# Altium PCB PCB1.PcbDoc
Units mm, origin at the board's own origin, x right, y up, seen from the top; angles counter-clockwise.
Board outline 20 x 40 mm, 2 copper layers (Top Layer, Bottom Layer); 2 components, 30 nets, 60 pads, 0 vias.
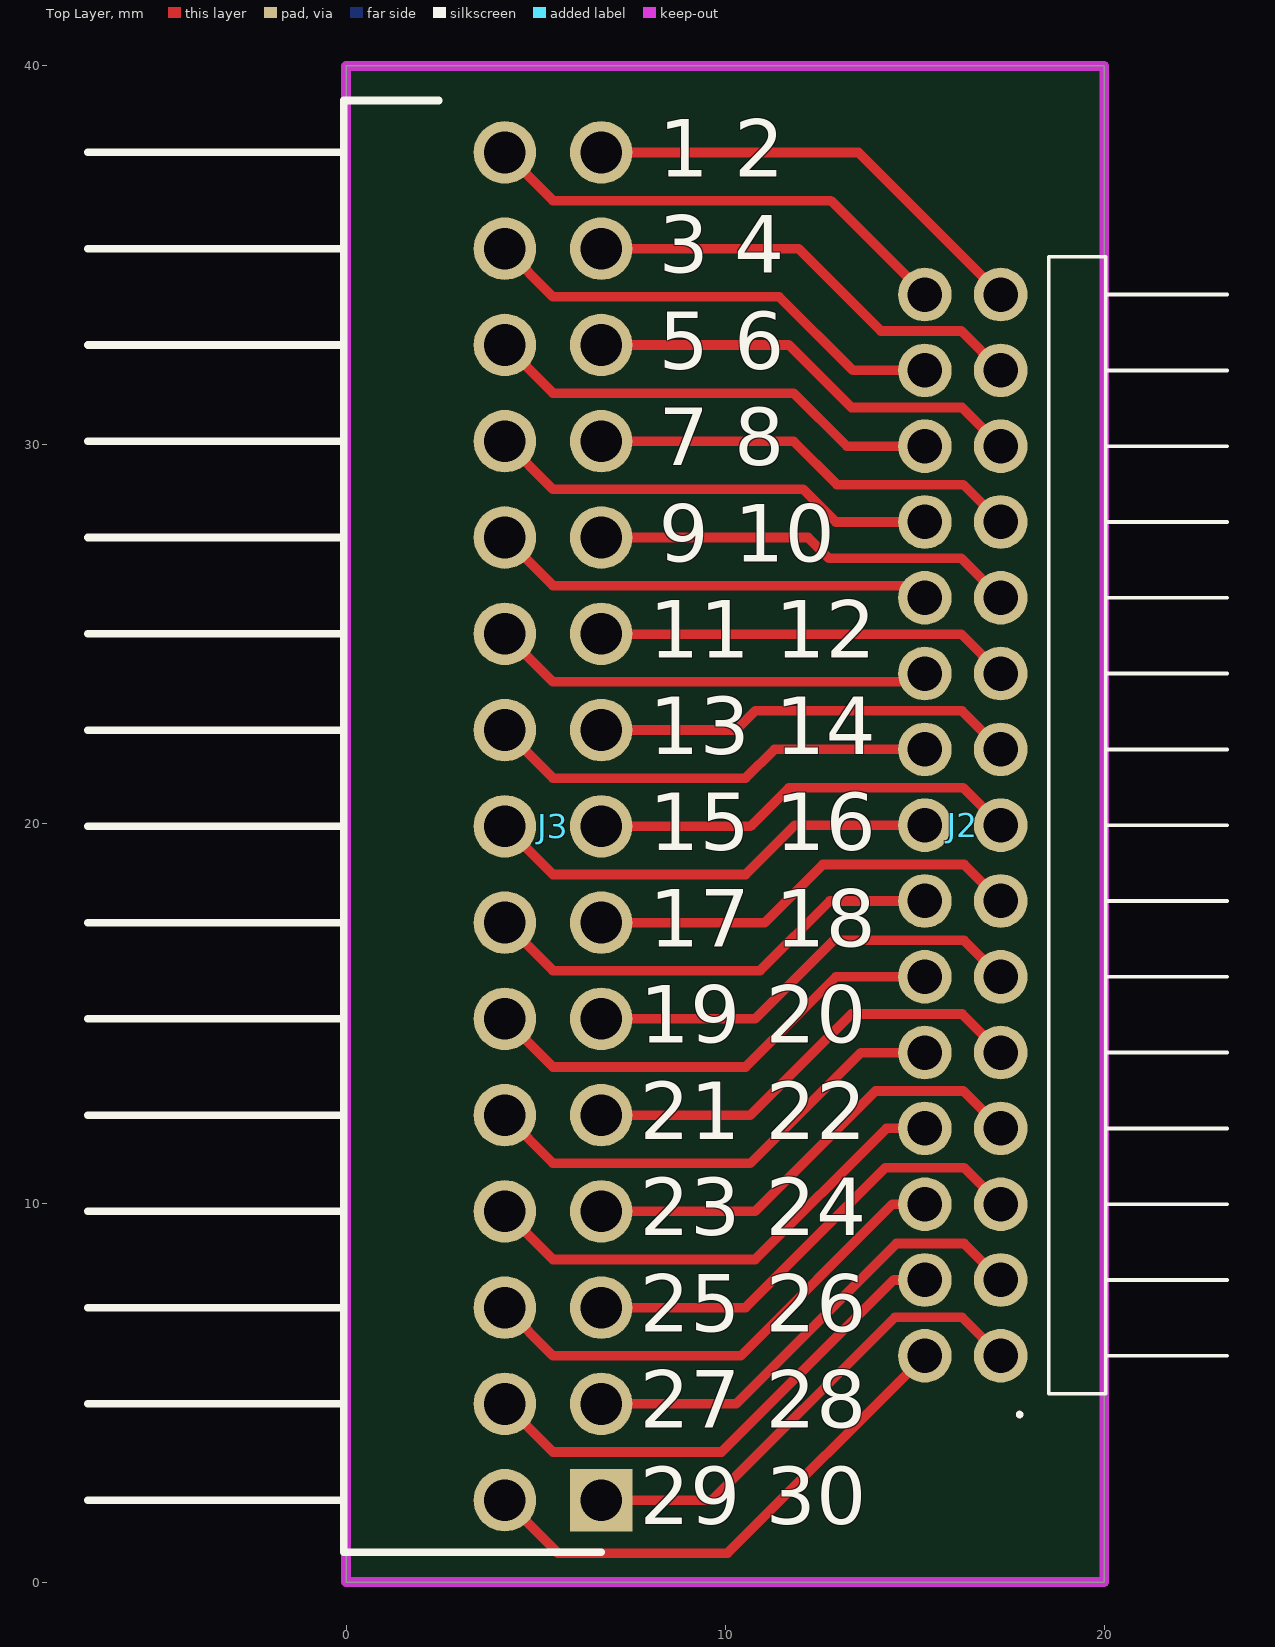
[diagram p0: Top Layer view]
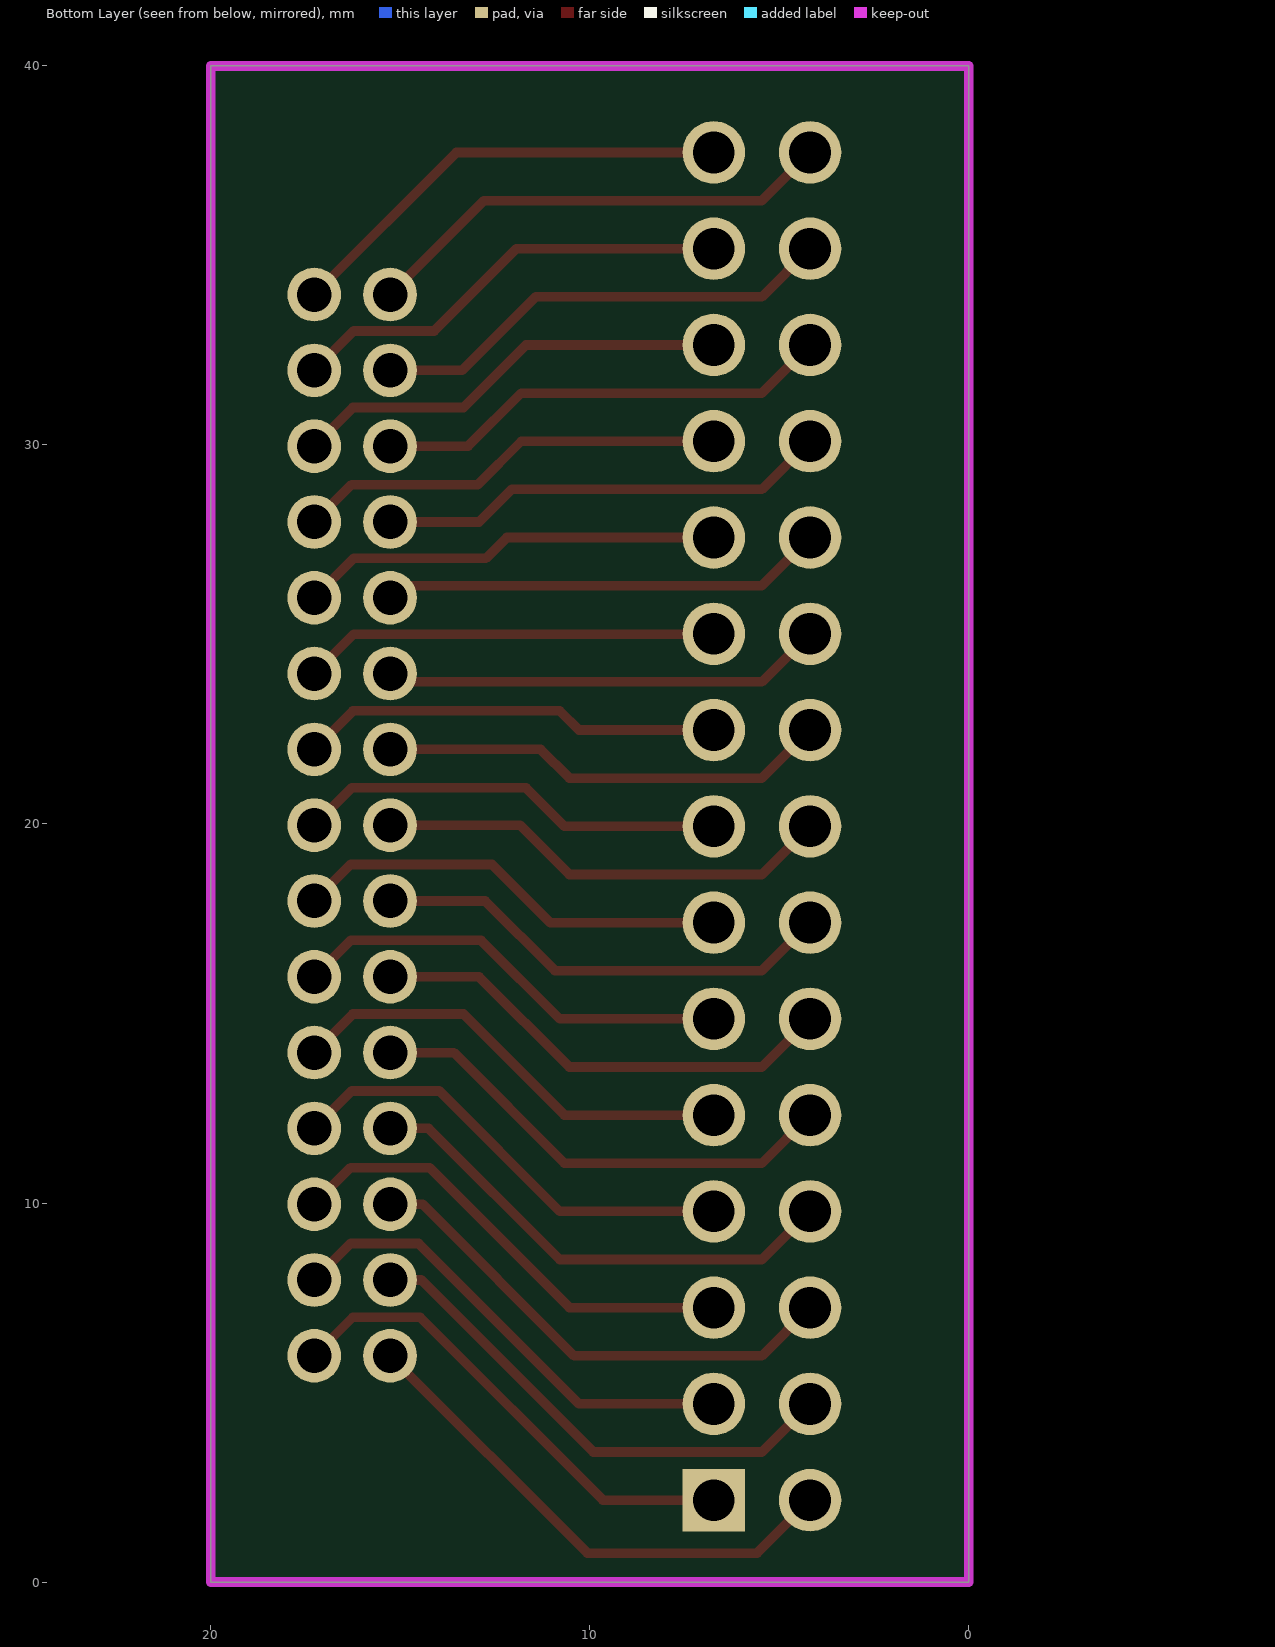
[diagram p1: Bottom Layer view, seen from below]

## Layer stack, top to bottom
Top Solder: solder mask 0.0102, Solder Resist, Dk 3.5
Top Layer: signal copper 0.0356
Dielectric 1: dielectric 0.32, FR-4, Dk 4.8
Bottom Layer: signal copper 0.0356
Bottom Solder: solder mask 0.0102, Solder Resist, Dk 3.5

## Board outline
0,0 0,40 20,40 20,0

## Design rules (kind name [scope] priority, off if disabled: settings)
BoardOutlineClearance [All] p1: gap=0.2
Clearance [All] p1: gap=0.127
ComponentClearance [All] p1: gap=0.127 collisioncheckmode=3 verticalgap=0.127 showdistances=TRUE
DiffPairsRouting [All] p1: maxlimit=0.254 minlimit=0.127 mostfreqgap=0.127 toplayer_minwidth=0.127 toplayer_maxwidth=25.4 toplayer_prefwidth=0.127 bottomlayer_minwidth=0.127 bottomlayer_maxwidth=25.4 bottomlayer_prefwidth=0.127 maxuncoupledlength=12.7
Height [All] p1: minheight=0 maxheight=1816.048 prefheight=12.7
HoleSize [All] p1: absolutevalues=TRUE maxlimit=6.3 minlimit=0.3 maxpercent=80.000 minpercent=20.000
HoleToHoleClearance [All] p1: gap=0.25 allowstackedmicrovias=FALSE
MinimumAnnularRing [All] p1: minimumring=0.076
MinimumSolderMaskSliver [All] p1: minsoldermaskwidth=0
PlaneClearance [All] p1: clearance=0.127
PlaneConnect PlaneConnectPowerPads [InPadClass('PowerPads')] p1: planeconnectstyle=Direct reliefexpansion=0.508 reliefentries=4 reliefconductorwidth=0.254 reliefairgap=0.254
PlaneConnect [All] p2: planeconnectstyle=Relief reliefexpansion=0.508 reliefentries=4 reliefconductorwidth=0.254 reliefairgap=0.254
PolygonConnect PolygonConnectPowerPads [All vs (InPadClass('PowerPads'))] p1: connectstyle=Direct reliefconductorwidth=0.254 reliefentries=4 polygonreliefangle="90 Angle" airgapwidth=0.254
PolygonConnect [All] p2: connectstyle=Relief reliefconductorwidth=0.254 reliefentries=4 polygonreliefangle="45 Angle" airgapwidth=0.254
RoutingVias [All] p1: holewidth=0.3 width=0.6 viastyle="Through Hole" minholewidth=0.3 minwidth=0.6 maxholewidth=0.6 maxwidth=6.6
SilkToSilkClearance [All] p1: silktosilkclearance=0
SilkToSolderMaskClearance [IsPad] p1: minsilkscreentomaskgap=0.127 clearancetoexposedcopper=TRUE
SolderMaskExpansion [All] p1: expansion=0.075
Width [All] p1: maxlimit=25.4 minlimit=0.127 preferedwidth=0.254 minimp=50.000000 maximp=50.000000 favimp=50.000000
20 further rules are at their usual default settings.

## Components (designator, comment, footprint, x,y, rotation, side; value= is the part's Value field where it differs from the comment)
J2 "TMM-115-01-S-D-RA" TMM11501SDRA 17.272,5.969 r90 top locked
J3 "90122-0775" HDRRA30W65P254_2X15_3802X250X635P 6.731,2.159 r90 top locked

## Footprints (in the part's own frame and the unit in brackets; to place one, negate y for a bottom-side part, rotate by r counter-clockwise, add the part's x,y. Pads: shape width x height; smd on the part's side, far side on the other; paste and mask are expansions set on the pad)
HDRRA30W65P254_2X15_3802X250X635P [mm]
  rect 1.65x1.65 hole 1.1: 1(0,0)
  round 1.65 hole 1.1: 2(0,2.54) 3(2.54,0) 4(2.54,2.54) 5(5.08,0) 6(5.08,2.54) 7(7.62,0) 8(7.62,2.54) 9(10.16,0) 10(10.16,2.54) 11(12.7,0) 12(12.7,2.54) 13(15.24,0) 14(15.24,2.54) 15(17.78,0) 16(17.78,2.54) 17(20.32,0) 18(20.32,2.54) 19(22.86,0) 20(22.86,2.54) 21(25.4,0) 22(25.4,2.54) 23(27.94,0) 24(27.94,2.54) 25(30.48,0) 26(30.48,2.54) 27(33.02,0) 28(33.02,2.54) 29(35.56,0) 30(35.56,2.54)
  silkscreen extent -1.37,0 36.93,13.54, body extent -1.27,-0.35 36.83,13.51, height 6.07
TMM11501SDRA [mm]
  round 1.416 hole 0.91: 1(0,0) 2(0,2) 3(2,0) 4(2,2) 5(4,0) 6(4,2) 7(6,0) 8(6,2) 9(8,0) 10(8,2) 11(10,0) 12(10,2) 13(12,0) 14(12,2) 15(14,0) 16(14,2) 17(16,0) 18(16,2) 19(18,0) 20(18,2) 21(20,0) 22(20,2) 23(22,0) 24(22,2) 25(24,0) 26(24,2) 27(26,0) 28(26,2) 29(28,0) 30(28,2)
  silkscreen extent -1.6,-5.97 29,-0.45, body extent -1,-2.77 29,2.35, height 4.04

## Part data
J2 J3: "Connector"

## Nets (pads, with @x,y where several pads share a name; then routed paths per layer and width w, separated by ;. In a path a pad name is that pad's centre, name@x,y a point inside that pad or via, vN(x,y) a via of type N, cw(c..) or ccw(c..) an arc to the next point about the centre after c; other vN are vias at no path point)
1: J2.30 J3.30 | length 12.6
  Top Layer w0.254: J3.30 5.461,36.449 12.792,36.449 J2.30
2: J2.29 J3.29 | length 12.1
  Top Layer w0.254: J3.29 13.522,37.719 J2.29
3: J2.28 J3.28 | length 12.4
  Top Layer w0.254: J3.28 5.461,33.909 11.43,33.909 13.37,31.969 J2.28
4: J2.27 J3.27 | length 11.9
  Top Layer w0.254: J3.27 11.938,35.179 14.11,33.007 16.234,33.007 J2.27
5: J2.26 J3.26 | length 12.2
  Top Layer w0.254: J3.26 5.461,31.369 11.811,31.369 13.211,29.969 J2.26
6: J2.25 J3.25 | length 11.6
  Top Layer w0.254: J3.25 11.684,32.639 13.335,30.988 16.253,30.988 J2.25
7: J2.24 J3.24 | length 12
  Top Layer w0.254: J3.24 5.461,28.829 12.065,28.829 12.925,27.969 J2.24
8: J2.23 J3.23 | length 11.4
  Top Layer w0.254: J3.23 11.811,30.099 12.954,28.956 16.285,28.956 J2.23
9: J2.22 J3.22 | length 11.3
  Top Layer w0.254: J3.22 5.461,26.289 J2.22@14.952,26.289
10: J2.21 J3.21 | length 11.2
  Top Layer w0.254: J3.21 12.192,27.559 12.744,27.007 16.234,27.007 J2.21
11: J2.20 J3.20 | length 11.4
  Top Layer w0.254: J3.20 5.461,23.749 J2.20@15.052,23.749
12: J2.19 J3.19 | length 11
  Top Layer w0.254: J3.19 6.731,25.007 16.234,25.007 J2.19
13: J2.18 J3.18 | length 11.9
  Top Layer w0.254: J3.18 5.461,21.209 10.543,21.209 11.303,21.969 J2.18
14: J2.17 J3.17 | length 11.2
  Top Layer w0.254: J3.17 10.287,22.479 10.795,22.987 16.254,22.987 J2.17
15: J2.16 J3.16 | length 12.1
  Top Layer w0.254: J3.16 5.461,18.669 10.541,18.669 11.841,19.969 J2.16
16: J2.15 J3.15 | length 11.4
  Top Layer w0.254: J3.15 10.668,19.939 11.684,20.955 16.286,20.955 J2.15
17: J2.14 J3.14 | length 12.4
  Top Layer w0.254: J3.14 5.461,16.129 10.922,16.129 12.762,17.969 J2.14
18: J2.13 J3.13 | length 11.6
  Top Layer w0.254: J3.13 11.049,17.399 12.581,18.931 16.31,18.931 J2.13
19: J2.12 J3.12 | length 12.6
  Top Layer w0.254: J3.12 5.461,13.589 10.541,13.589 12.921,15.969 J2.12
20: J2.11 J3.11 | length 11.8
  Top Layer w0.254: J3.11 10.795,14.859 12.867,16.931 16.31,16.931 J2.11
21: J2.10 J3.10 | length 12.8
  Top Layer w0.254: J3.10 5.461,11.049 10.668,11.049 13.588,13.969 J2.10
22: J2.9 J3.9 | length 12.1
  Top Layer w0.254: J3.9 10.668,12.319 13.335,14.986 16.255,14.986 J2.9
23: J2.8 J3.8 | length 13
  Top Layer w0.254: J3.8 5.461,8.509 10.795,8.509 14.255,11.969 J2.8
24: J2.7 J3.7 | length 12.3
  Top Layer w0.254: J3.7 10.795,9.779 13.97,12.954 16.287,12.954 J2.7
25: J2.6 J3.6 | length 13.3
  Top Layer w0.254: J3.6 5.461,5.969 10.414,5.969 14.414,9.969 J2.6
26: J2.5 J3.5 | length 12.5
  Top Layer w0.254: J3.5 10.541,7.239 14.233,10.931 16.31,10.931 J2.5
27: J2.4 J3.4 | length 13.5
  Top Layer w0.254: J3.4 5.461,3.429 9.906,3.429 14.446,7.969 J2.4
28: J2.3 J3.3 | length 12.7
  Top Layer w0.254: J3.3 10.287,4.699 14.519,8.931 16.31,8.931 J2.3
29: J2.2 J3.2 | length 13.8
  Top Layer w0.254: J3.2 5.588,0.762 10.065,0.762 J2.2
30: J2.1 J3.1 | length 13
  Top Layer w0.254: J3.1 9.652,2.159 14.478,6.985 16.256,6.985 J2.1

## Keep-outs
Keep-Out Layer:
  the board outline again, w0.254

## Silkscreen, mask and mechanical layers (free items; w line width, h text height)
Top Overlay:
  text "1 2" at 8.255,37.084 h1.52
  text "3 4" at 8.255,34.544 h1.52
  text "5 6" at 8.255,32.004 h1.52
  text "7 8" at 8.255,29.464 h1.52
  text "9 10" at 8.255,26.924 h1.52
  text "11 12" at 8.001,24.384 h1.52
  text "13 14" at 8.001,21.844 h1.52
  text "15 16" at 8.001,19.304 h1.52
  text "17 18" at 8.001,16.764 h1.52
  text "19 20" at 7.747,14.224 h1.52
  text "21 22" at 7.747,11.684 h1.52
  text "23 24" at 7.747,9.144 h1.52
  text "25 26" at 7.747,6.604 h1.52
  text "27 28" at 7.747,4.064 h1.52
  text "29 30" at 7.747,1.524 h1.52